# Altium PCB УШЯИ 758725.634.PcbDoc (part 2 of 2)
Units mm, origin at the board's own origin, x right, y up, seen from the top; angles counter-clockwise.
Board outline 220 x 115 mm, 2 copper layers (Top Layer, Top, Bottom Layer, Bottom), stack 1.571 mm thick; 229 components, 122 nets, 707 pads, 215 vias.
Unrouted connection lines stored in the file: 1.
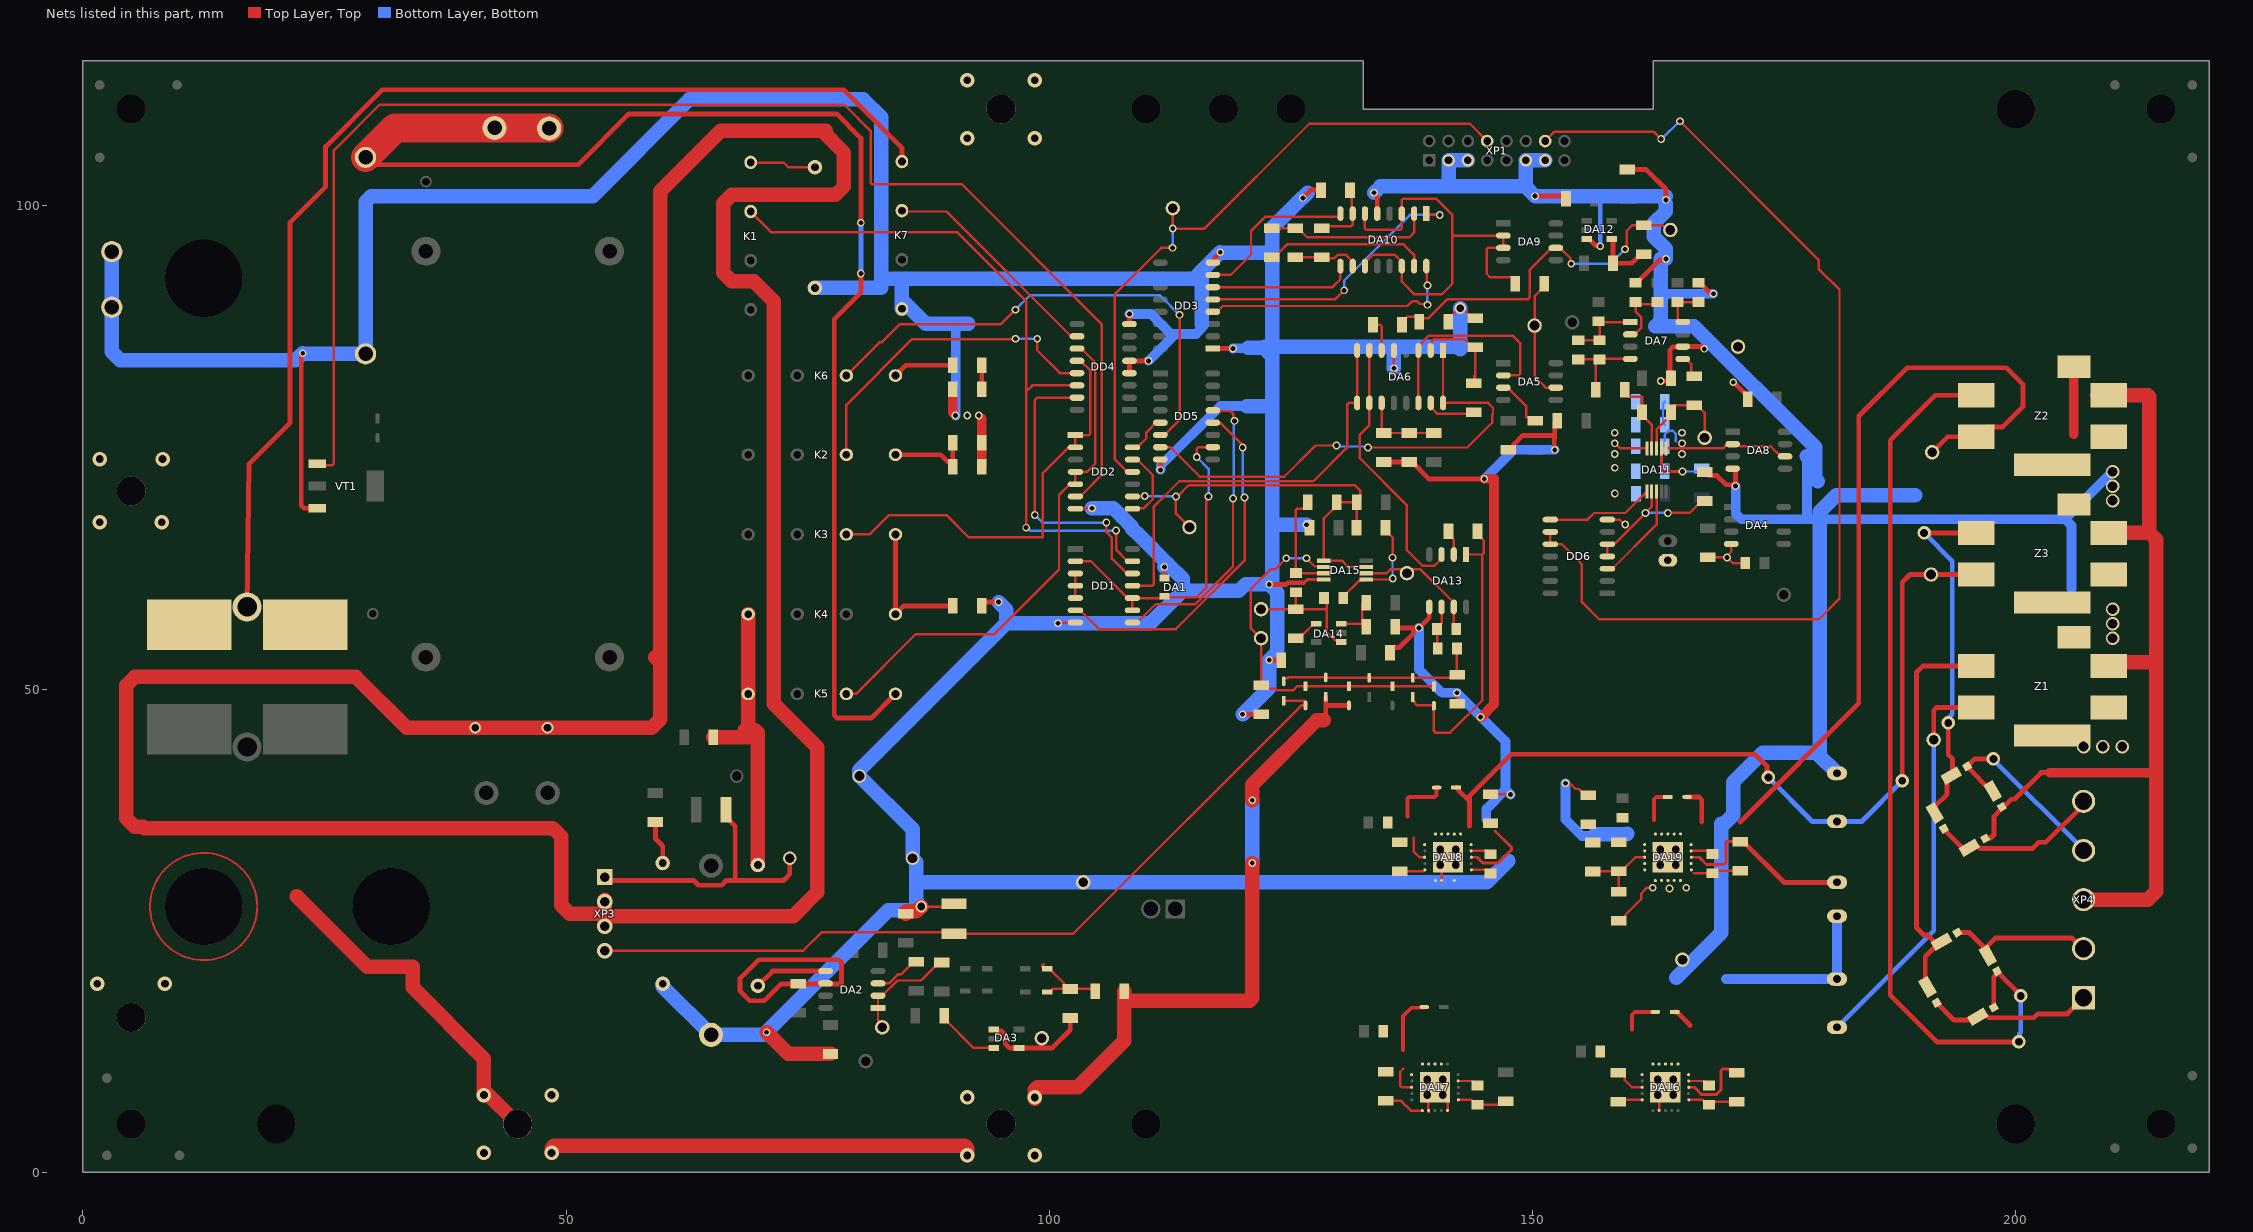
[diagram p2: the nets of this part, all layers, seen from the top]

## Via types
v1: diameter 0.8, hole 0.5, Top Layer, Top to Bottom Layer, Bottom, 151 vias
v2: diameter 1.2, hole 0.8, Top Layer, Top to Bottom Layer, Bottom, 20 vias
v3: diameter 1.5, hole 0.8, Top Layer, Top to Bottom Layer, Bottom, 18 vias
v4: diameter 1.8, hole 1, Top Layer, Top to Bottom Layer, Bottom, 10 vias
v5: diameter 1.4, hole 1, Top Layer, Top to Bottom Layer, Bottom, 9 vias
v6: diameter 1.4, hole 0.8, Top Layer, Top to Bottom Layer, Bottom, 7 vias

## Nets (pads, with @x,y where several pads share a name; then routed paths per layer and width w, separated by ;. In a path a pad name is that pad's centre, name@x,y a point inside that pad or via, vN(x,y) a via of type N, cw(c..) or ccw(c..) an arc to the next point about the centre after c; other vN are vias at no path point) (continued)
GNDV: C1.1 C4.2 C5.1 C7.2 C8.1 C9.1 C10.2 C11.1 C12.2 C14.2 C15.2 C16.2 C18.2 C19.1 C20.1 C21.2 C22.2 C23.2 C24.1 C25.2 C26.1 C27.2 C28.2 C29.1 C30.2 C31.1 C32.1 C33.1 C34.1 C35.1 C36.1 C37.1 C38.1 C39.1 C40.1 C41.1 C43.1 DA1.1 DA4.4 DA6.5 DA7.6 DA8.4 DA10.5 DA11.5 DA12.3 DA13.5 DA15.4 DA16.5 DA16.7 DA16.11 DA16.17 DA16.18 DA16.19 DA16.21 DA17.6 DA17.7 DA17.10 DA17.11 DA17.17 DA17.18 DA17.19 DA17.21 DA18.5 DA18.6 DA18.7 DA18.9 DA18.11 DA18.17 DA18.18 DA18.19 DA18.21 DA19.4 DA19.5 DA19.6 DA19.7 DA19.8 DA19.9 DA19.10 DA19.11 DA19.12 DA19.17 DA19.18 DA19.19 DA19.21 DD1.7 DD2.7 DD3.1 DD3.8 DD4.4 DD4.5 DD4.8 DD5.8 DD6.7 FV1.1 FV2.1 K7.7 KT8.1 KT18.1 KT19.1 pad.2@3,89.5 pad.2@3,95.25 R1.1 R2.1 R3.1 R4.1 R5.1 R6.1 R7.1 R19.1 R21.1 R26.2 R27.1 R31.1 R37.1 R42.1 R45.1 R47.2 R48.1 R57.1 VT1.3 XP1.3 XP1.5 XP1.11 XP1.13 Z1.4 Z2.4 Z3.4 | length 1017.7
  Top Layer, Top w0.25: C12.2@147.5,74.75 148.087,75.337
  Top Layer, Top w0.254: v2(86.75,27.5) 89.821,27.5 R19.1@90.121,27.8 ; v1(100.9,56.8) 100.939,56.839 102.661,56.839 DD1.7@102.7,56.877 ; DD2.7@102.7,68.659 102.728,68.687 104.382,68.687 v1(104.41,68.715) ; DA1.1@111.9,61.5 v1(111.9,62.638) ; DD3.1@116.912,85.229 DD3.1@116.948,85.264 ; DD3.8@116.912,94.119 116.966,94.119 DD3.8@117.149,94.301 ; R47.2@121.895,47.4 R47.2@121.904,47.409 ; C38.1@134.8,7.399 136.387,7.399 137.404,6.382 DA17.6@138.6,6.382 ; v1(135.649,83.198) DA6.5@135.649,85.029 ; C39.1@136.243,31.135 138.661,31.135 138.826,31.3 DA18.5@138.843,31.3 ; R21.1@137,73.492 R21.1@137.232,73.492 R21.1@137.532,73.492 ; DA17.7@139.179,6.382 139.197,6.4 139.197,8.097 DA17.21@139.9,8.8 v2(140.7,8) 141.2,7.5 DA17.10@141.2,6.4 ; 139.197,6.247 139.238,6.288 139.238,6.388 DA17.7@139.25,6.4 ; 140.593,30.043 DA18.7@140.593,30.2 140.593,31.95 DA18.21@141.243,32.6 ; C19.1@141.284,87.996 141.284,88.296 142.387,89.4 v2(142.5,89.4) 142.604,89.296 142.861,89.296 143.784,88.372 R31.1@144.084,88.372 ; v1(142.172,49.615) 142.172,48.528 R48.1@142.204,48.496 ; DA17.11@142.318,7.5 143.65,7.5 144.175,6.975 C35.1@144.3,6.975 146.508,6.975 146.9,7.367 C31.1@147.2,7.367 ; DA18.11@143.661,31.3 145.133,31.3 145.518,30.915 C36.1@145.643,30.915 ; C32.1@145.643,39.1 v1(147.7,39.1) ; v1(153.4,40.25) 153.504,40.146 153.954,40.146 154.442,39.658 154.792,39.658 155.45,39 C43.1@155.75,39 ; DD6.7@157.735,67.532 158.972,67.532 159.467,67.036 v1(159.581,67.036) ; v1(158.491,75.422) 158.555,75.422 159.075,74.902 DA11.5@161.82,74.902 ; C34.1@158.86,7.3 159.06,7.5 DA16.5@161.326,7.5 ; R57.1@158.9,26.025 159.2,26.025 159.573,26.398 159.573,26.599 161.227,28.253 161.227,28.827 161.851,29.451 v1(162.425,29.451) ; R26.2@160.654,92.042 R26.2@160.779,92.042 ; DA16.7@163.093,6.4 163.093,8.15 DA16.21@163.743,8.8 ; v1@163.696,94.396 v1(163.8,94.5) ; DA16.11@166.161,7.5 167.593,7.5 168.118,6.975 C33.1@168.243,6.975 168.568,7.3 C29.1@171.143,7.3 ; 166.668,30.933 C41.1@168.6,30.933 168.879,31.211 C40.1@171.5,31.211 ; R27.1@167.182,92.042 R27.1@167.307,92.042 ; R42.1@167.791,72.452 R42.1@168.164,72.079 ; C8.1@168.135,63.622 v1(170.116,63.622) ; v1@168.345,91.004 168.596,91.004 v1(168.7,90.9) ; DA4.4@170.554,65.017 170.554,64.207 170.116,63.77 v1(170.116,63.622) ; DA8.4@170.696,72.802 170.817,72.802 DA8.4@171,72.619 ; v1@170.867,71.133 v1(171,71) ; C9.1@171.991,63.022 170.716,63.022 v1(170.116,63.622)
  Top Layer, Top w0.342: 126.332,61 126.666,61.334 DA15.4@128.412,61.334
  Top Layer, Top w0.492: 124.662,61 126.332,61
  Top Layer, Top w0.5: v1(22.75,84.75) 22.75,84.561 22.6,84.411 22.6,68.993 22.893,68.7 VT1.3@24.25,68.7 ; R5.1@93,58.6 93,58.75 93.25,59 v1(94.75,59) ; DD4.4@108.287,82.688 DD4.5@108.287,83.958 v1(110.25,83.958) ; DD4.8@108.287,87.768 v1(108.287,88.809) ; v1(111.488,72.681) DD5.8@111.488,73.755 ; DD3.1@116.948,85.264 116.983,85.229 v1(119,85.229) ; DD3.8@117.149,94.301 117.149,94.661 v1(117.674,95.186) ; v1(120,47.4) R47.2@121.895,47.4 ; v1(122.75,53) C25.2@124,53 ; v1(122.75,60.831) 124.493,60.831 124.662,61 ; v1(126.228,100.822) 127.028,101.622 R37.1@128.114,101.622 ; v1(133.599,101.343) 133.599,101.261 133.924,100.936 DA10.5@133.924,99.192 ; C10.2@134.607,73.5 R21.1@137,73.5 ; C26.1@135.25,53.75 135.25,54.05 135.5,54.3 136.221,54.3 137.651,55.73 137.651,56.2 137.785,56.334 ; R45.1@135.8,56.459 135.8,56.334 137.785,56.334 ; R21.1@137.532,73.492 139.274,71.75 v1(145,71.75) ; DA13.5@139.307,58.497 139.307,57.39 v1(138.25,56.334) 137.785,56.334 ; 148.087,75.337 149,76.25 152.298,76.25 ; v1(150.25,101) 153.197,101 C24.1@153.447,100.75 ; v1(152.298,74.75) 152.241,74.807 152.241,75.861 152.298,75.918 152.298,76.25 ; C11.1@152.548,77.75 152.298,77.5 152.298,76.25 ; DA12.3@155.6,96.55 155.85,96.55 156.525,95.875 156.943,95.875 v1(157,95.818) ; C23.2@159.8,103.75 161.75,103.75 163.8,101.7 v1(163.8,100.612) ; R26.2@160.779,92.042 163.132,94.396 v1@163.696,94.396 ; v1(163.25,81.862) 164.02,81.862 164.221,82.064 164.221,85.105 164.514,85.398 165.503,85.398 DA7.6@165.532,85.427 167.52,85.427 v1(167.75,85.197) ; R27.1@167.307,92.042 v1@168.345,91.004 ; R42.1@168.164,72.079 169.073,72.079 170.019,71.133 v1@170.867,71.133 ; v1(170.75,81.75) 170.8,81.75 172.25,80.3 C14.2@172.25,80 ; v1(171,71) DA8.4@171,72.619
  Top Layer, Top w1: 90,78.6 R7.1@90,81 ; C1.1@93,73 R4.1@93,75.5 93,78 ; v1@144.645,47.074 146,48.429 146,71.75 v1(145,71.75) ; 206,76.382 Z2.4@206,83.35
  Top Layer, Top w1.5: v1(70.75,14.5) 73,12.25 C4.2@77.358,12.25 ; C5.1@85.12,26.75 85.12,26.95 85.17,27 86.25,27 v2(86.75,27.5)
  Bottom Layer, Bottom w0.254: v1@167.75,85 v1(167.75,85.197)
  Bottom Layer, Bottom w0.421: 163.277,100.226 163.277,101 163.277,101.111
  Bottom Layer, Bottom w0.5: v1(157,95.818) 157,101 157,101.062
  Bottom Layer, Bottom w1: 90.242,87.8 90.3,87.742 v1(90.3,78.3) ; v1(108.287,88.809) 110.527,88.809 112.577,86.759 112.577,86.736 113.028,86.736 ; v1(110.25,83.958) 113.028,86.736 ; v1(111.488,72.681) 111.526,72.719 111.526,73.123 117.687,79.285 120.416,79.285 ; 115.768,87.768 115.768,87.322 115.183,86.736 113.028,86.736 ; v1(119,85.229) 119.038,85.267 120.523,85.267 120.556,85.3 ; v1(138.25,56.334) 138.25,52 140.635,49.615 v1(142.172,49.615) 147.2,44.587 147.2,39.6 ; v1(145,71.75) 148,74.75 v1(152.298,74.75) ; 145.206,36.536 145.206,37.606 147.2,39.6 ; v1@147.75,39.05 v1(147.7,39.1) 147.2,39.6 ; v1(153.4,40.25) 153.4,36.5 155.104,34.796 156.1,34.796 ; 163.8,90.75 163.95,90.9 v1(168.7,90.9) ; v1@163.8,100.226 v1(163.8,100.612) v1@163.8,100.997 ; 170,20 C28.2@181.493,20 ; v1(171,71) 171,68.171 171.586,67.585 178.25,67.585 ; 178.384,74.091 178.384,67.719 178.25,67.585 ; C28.2@181.5,20.007 C37.1@181.5,26.5 ; 205.75,60.375 205.75,66.92 205.085,67.585 ; v5(210,72.5) 205.085,67.585 ; 178.25,67.585 179.725,67.585 205.085,67.585
  Bottom Layer, Bottom w1.5: pad.2@3,95.25 pad.2@3,89.5 3,84.879 3.879,84 22,84 v1(22.75,84.75) 22.82,84.68 R6.1@29.25,84.68 29.25,100.414 29.836,101 52.75,101 62.75,111 80.75,111 82.59,109.16 82.59,92.429 ; R2.1@60,19.5 60,19.22 R1.1@65,14.22 70.47,14.22 83.348,27.098 86.348,27.098 v2(86.75,27.5) 86.25,28 86.25,30 ; R3.1@75.75,91.5 82.59,91.5 82.59,92.429 ; K7.7@84.75,89.34 84.75,91.965 85.215,92.429 ; K7.7@85.215,89.805 87.219,87.8 90.242,87.8 91.625,87.8 ; v1(94.75,59) 95.55,58.2 95.55,56.8 ; v1(100.9,56.8) 95.55,56.8 ; v1@101.027,56.8 110.449,56.8 113.799,60.15 ; v1(104.41,68.715) 106.636,68.715 107.501,67.85 108.544,66.807 108.544,66.649 109.393,65.8 112.228,62.966 ; v1(111.9,62.638) 112.228,62.966 ; 115.768,87.768 115.768,93.28 ; v1(120,47.4) 122.75,50.15 v1(122.75,53) 123.604,53.854 123.604,59.977 v1(122.75,60.831) ; 120.416,79.285 122.648,79.285 123.056,78.877 ; 120.556,85.3 122.177,85.3 ; v1(126.612,67) 123.056,67 ; 126.748,101.343 v1(126.228,100.822) 126.167,100.822 123.056,97.711 123.056,95.117 ; v1(133.599,101.343) 134.257,102 149.25,102 149.3,101.95 ; v1(135.649,83.198) 135.649,85.417 ; 141.3,102.25 XP1.3@141.3,104.7 XP1.5@143.3,104.7 ; 142.235,85.417 135.649,85.417 ; 142.5,85.152 v2(142.5,89.4) ; 147.5,32.25 145.25,30 KT18.1@103.5,30 86.25,30 ; XP1.13@151.3,104.7 XP1.11@149.3,104.7 149.3,101.95 ; 156.496,35 159.718,35 159.773,35.056 ; 163.277,94.5 163.277,88.119 162.711,87.553 166.697,87.553 179.25,75 179.25,73.225 ; v1(163.8,94.5) 163.8,95.546 162.55,96.796 162.55,98.204 163.8,99.454 v1@163.8,100.226 ; v1@163.8,100.997 163.797,101 163.277,101 157,101 v1(150.25,101) 149.3,101.95 ; 164.875,20.125 169.528,24.778 169.528,36.075 169.825,36.075 170.75,37 170.75,40.383 173.802,43.435 179.108,43.435 ; 178.384,74.091 179.25,73.225 ; 179.484,71.516 179.25,71.75 179.25,73.225 ; C30.2@181.493,41.3 181.243,41.3 181.193,41.35 181.193,41.6 179.725,43.068 179.725,67.585 179.725,68.335 181.432,70.042 189.578,70.042 ; 82.59,92.429 85.215,92.429 ; 85.215,92.429 114.918,92.429 115.768,93.28 ; 86.25,30 86.25,32.1 FV1.1@85.85,32.5 85.85,35.5 FV2.1@80.35,41 80.35,41.6 95.55,56.8 ; 112.228,62.966 113.799,61.394 113.799,60.15 ; 113.799,60.15 119.615,60.15 120.296,60.831 v1(122.75,60.831) ; 115.768,93.28 v1(117.674,95.186) 117.744,95.117 123.056,95.117 ; 122.177,85.3 123.056,84.421 ; 122.177,85.3 122.294,85.417 123.056,85.417 ; v1(122.75,60.831) 123.056,61.137 123.056,67 ; 123.056,67 123.056,78.877 ; 123.056,78.877 123.056,84.421 ; 123.056,84.421 123.056,85.417 ; 123.056,85.417 123.056,95.117 ; 123.056,85.417 135.649,85.417
  other v1: 164.162,29.377 165.9,29.451 144.617,47.101 158.51,70.238 158.51,72.901 158.491,74.322 158.491,76.522 91.5,78.3 92.7,78.3
  other v2: 139.1,8 162.943,8 164.543,8 139.1,9.6 140.7,9.6 162.943,9.6 164.543,9.6 140.443,31.8 142.043,31.8 163.2,31.8 164.8,31.8 140.443,33.4 142.043,33.4 163.2,33.4 164.8,33.4
  other v5: 207.003,44.05 209,44.05 211,44.05 210,55.25 210,56.75 210,58.25 210,69.5 210,71
GRD: pad.0@5,16 pad.0@5,70.5 pad.0@45,5 pad.0@95,5 pad.0@95,110 R18.2 VD8.2 VD13.1 XP3.2 XP3.3 | length 510.3
  Top Layer, Top w0.2: 18.051,27.5 ccw(c12.5,27.5) 18.051,27.5
  Top Layer, Top w0.5: 128.404,46.75 128.6,46.946 128.6,48.302 ; VD13.1@128.6,49.203 128.6,48.302 ; VD8.2@131,48.302 128.6,48.302
  Top Layer, Top w1.5: 22.125,28.564 29.439,21.25 34.121,21.25 34.121,19.129 41.5,11.75 v3(41.5,8) ; v3@41.75,8.25 pad.0@45,5 ; v3(48.5,2) 48.5,2.5 48.75,2.75 91.25,2.75 91.5,2.5 v3(91.5,1.75) ; XP3.3@54,25.46 54,26.5 ; XP3.2@54,28.2 XP3.2@54,28 54,26.5 ; 59.24,53.3 59.75,52.79 ; 76.862,107.75 76.5,107.75 ; v3@98.5,7.621 v3(98.5,7.75) 98.5,8.55 98.75,8.8 102.954,8.8 107.75,13.596 107.75,17.75 ; R18.2@107.75,18.75 107.75,17.75 ; v1(121,32) 121,18.038 120.712,17.75 107.75,17.75 ; v1(121,38.5) 121,40.109 127.641,46.75 128.404,46.75 ; 54,26.5 73.5,26.5 76,29 76,43.959 71.5,48.459 71.5,90.121 69.421,92.2 67.129,92.2 66.25,93.079 66.25,100.243 67.129,101.121 77.871,101.121 78.75,102 78.75,105.5 76.5,107.75 ; 54,26.5 53.75,26.75 50.379,26.75 49.5,27.629 49.5,34.743 48.621,35.621 6.379,35.621 6.25,35.75 5.379,35.75 4.5,36.629 4.5,50.371 5.379,51.25 28.25,51.25 33.5,46 v2(40.611,46) v2(48.074,46) 58.871,46 59.75,46.879 59.75,52.79 ; 59.75,52.79 59.75,101.5 66,107.75 76.5,107.75
  Bottom Layer, Bottom w1.5: v1(121,32) v1(121,38.5)
  other v3: 98.5,1.75 41.5,2 91.5,7.75 48.5,8 1.5,19.5 8.5,19.5 1.75,67.25 8.173,67.25 1.75,73.8 8.25,73.8 91.5,107 98.5,107 91.5,113 98.5,113
I0: DD1.12 DD4.15 | length 30.8
  Top Layer, Top w0.254: v1(98.5,68) 98.5,79.9 98.749,80.148 DD4.15@102.863,80.148 ; v1(105.897,67.227) 105.897,66.234 106.473,65.657 106.473,63.501 108.017,61.957 DD1.12@108.6,61.957
  Bottom Layer, Bottom w0.254: v1(98.5,68) 99.273,67.227 v1(105.897,67.227)
K1: DD1.13 DD4.14 K1.3 | length 74.9
  Top Layer, Top w0.254: K1.3@69.1,99.41 71.26,97.25 90.5,97.25 97.6,90.15 97.6,80.77 ; v1(97.6,66.7) 97.6,80.77 ; DD4.14@102.863,81.419 98.249,81.419 97.6,80.77 ; v1(106.9,66.4) 106.9,64.427 108.1,63.227 DD1.13@108.6,63.227
  Bottom Layer, Bottom w0.254: v1(97.6,66.7) 97.722,66.7 98.022,66.4 v1(106.9,66.4)
K2: DD4.13 K2.3 | length 34
  Top Layer, Top w0.254: K2.3@79,74.25 79,79.399 85.801,86.2 96.45,86.2 v1(96.5,86.25) ; v1(98.75,86.25) 98.75,85.033 101.095,82.688 DD4.13@102.863,82.688
  Bottom Layer, Bottom w0.254: v1(96.5,86.25) v1(98.75,86.25)
K3: DD2.1 DD2.2 DD4.12 K3.3 | length 44.4
  Top Layer, Top w0.254: K3.3@79,66 81.395,66 83.395,68 89.356,68 91.661,65.695 98.98,65.695 99.3,65.695 99.3,67.63 99.327,67.657 99.327,68.343 99.3,68.37 99.3,72.3 101.942,74.942 102.634,74.942 DD2.2@102.7,75.009 DD2.1@102.7,76.279 104.101,76.279 104.25,76.427 104.25,82.941 103.233,83.958 DD4.12@102.863,83.958
K4: DD2.4 DD2.5 DD4.11 K5.3 | length 53.8
  Top Layer, Top w0.254: K5.3@79,49.5 80,49.5 86.179,55.679 94.322,55.679 101,62.357 101,70.07 102.128,71.199 DD2.5@102.7,71.199 DD2.4@102.7,72.469 103.881,72.469 104.75,73.338 104.75,83.779 103.3,85.229 DD4.11@102.863,85.229
K5: DD4.10 K7.3 | length 23.5
  Top Layer, Top w0.254: K7.3@84.75,99.5 84.84,99.41 89.34,99.41 102.093,86.657 102.159,86.657 102.318,86.498 DD4.10@102.863,86.498
KC: DD5.6 K6.3 | length 52
  Top Layer, Top w0.254: K6.3@79,82.438 82.42,85.858 82.652,85.858 84.544,87.75 95,87.75 v1(96.5,89.25) ; DD5.6@111.707,76.295 111.925,76.295 113.477,77.846 v1(113.477,88.714)
  Bottom Layer, Bottom w0.254: v1(96.5,89.25) 98,90.75 106.947,90.75 109.626,90.75 111.441,90.75 v1(113.477,88.714)
NetC1_2: C1.2 K2.1 R4.2 | length 9.1
  Top Layer, Top w0.5: K2.1@84.08,74.25 88.75,74.25 89.45,73.55 89.75,73.55 90,73.3 C1.2@90,73 R4.2@90,75.5
NetC2_1: C2.1 R7.2 | length 2.5
  Top Layer, Top w0.5: R7.2@93,81 C2.1@93,83.5
NetC2_2: C2.2 K6.1 | length 6.4
  Top Layer, Top w0.5: K6.1@84.08,82.438 85.142,83.5 C2.2@90,83.5
NetC3_1: C3.1 R2.2 | length 4.6
  Top Layer, Top w0.5: C3.1@59.25,36.25 59.25,34.51 60,33.76 R2.2@60,32
NetC10_1: C10.1 DA6.11 R20.1 R21.2 | length 8.4
  Top Layer, Top w0.254: DA6.11@134.379,79.605 134.379,76.728 C10.1@134.607,76.5 134.615,76.492 R20.1@139.765,76.492
NetC13_1: C13.1 DA7.1 R25.2 R28.1 | length 9.6
  Top Layer, Top w0.254: C13.1@154.72,86.102 R28.1@156.947,86.102 ; R25.2@156.82,88.042 157.053,88.042 156.946,87.936 R28.1@156.946,86.475 ; R28.1@156.92,86.102 R28.1@156.946,86.128 ; R25.2@157.053,87.967 DA7.1@160.108,87.967 ; R28.1@156.947,86.102 R28.1@157.32,86.475 ; R28.1@156.947,86.102 R28.1@157.32,86.475 ; R28.1@156.946,86.128 R28.1@156.946,86.475 ; R28.1@156.946,86.128 R28.1@156.946,86.475 ; R28.1@156.946,86.128 R28.1@156.946,86.475 ; R28.1@156.946,86.475 R28.1@157.32,86.475
NetC13_2: C13.2 DA7.4 R28.2 R33.1 | length 8.1
  Top Layer, Top w0.254: C13.2@154.72,84.102 156.52,84.102 R33.1@156.52,80.962 ; R28.2@156.975,84.157 DA7.4@160.108,84.157
NetC16_1: C16.1 C18.1 C21.1 DA8.2 DA8.6 DA11.1 | length 18.6
  Top Layer, Top w0.254: DA11.1@163.82,74.902 169.711,74.902 DA8.2@170.151,75.342 ; DA8.2@170.258,75.342 DA8.2@170.477,75.342 ; DA8.2@170.696,75.342 171.24,75.342 171.47,75.112 174.642,75.112 175.682,74.072 DA8.6@176.12,74.072
  Bottom Layer, Bottom w0.254: C16.1@163.67,75.127 163.67,76.327 164.067,76.724 164.494,76.724 164.795,76.424 164.795,75.65 ; C21.1@163.67,77.349 163.491,77.528 163.491,79.543 C18.1@163.67,79.722
  other v1: 165.462,74.322 165.462,75.422 165.462,76.522
NetC19_2: C19.2 DA9.6 KT7.1 R38.1 R39.2 | length 37.2
  Top Layer, Top w0.254: R39.2@136.49,87.696 136.49,87.996 136.99,88.496 137.911,88.496 138.284,88.123 C19.2@138.284,87.996 138.284,87.999 138.657,88.372 139.232,88.372 141.209,90.349 149.538,90.349 149.726,90.538 149.726,93.41 151.961,95.645 DA9.6@152.399,95.645 152.836,95.645 153.896,94.585 153.896,94.104 v1(154,94) ; v1(159.55,95.5) 159.55,95.648 159.75,95.848 159.75,97.423 160.327,98 R38.1@161.5,98 163.413,98 163.913,97.5 KT7.1@164.25,97.5
  Bottom Layer, Bottom w0.254: v1(154,94) 158.05,94 v1(159.55,95.5)
NetC20_2: C20.2 DA11.2 R40.1 | length 8.3
  Top Layer, Top w0.3: DA11.2@163.32,74.902 163.32,72.827 163.636,72.511 v1(165.51,72.511)
  Bottom Layer, Bottom w0.254: C20.2@163.67,72.511 v1(165.51,72.511) 167.18,72.511 R40.1@167.491,72.822
NetC28_1: C28.1 C29.2 DA16.13 DA16.15 DA16.16 KT15.1 VD22.1 Z1.3 | length 51.4
  Top Layer, Top w0.3: DA16.13@166.161,8.8 166.164,8.797 166.742,8.797 167.096,8.443 167.096,8.425 167.45,8.071 169.035,8.071 169.5,8.536 169.5,10.524 169.676,10.7 170.317,10.7 170.367,10.65 170.793,10.65 C29.2@171.143,10.3
  Top Layer, Top w0.5: VD22.1@164.7,16.6 164.899,16.6 166.3,15.199 ; KT15.1@191.5,44.75 191.5,47.807 191.793,48.1 Z1.3@195.9,48.1
  Bottom Layer, Bottom w0.5: C28.1@181.493,15 181.599,15 182.015,15.416 182.015,15.522 191.5,25.007 KT15.1@191.5,44.75
NetC30_1: C30.1 C32.2 DA18.13 DA18.15 DA18.16 KT17.1 VD24.1 Z3.3 | length 91.4
  Top Layer, Top w0.3: DA18.13@143.661,32.6 143.664,32.597 144.264,32.597 144.85,32.011 146.435,32.011 147.8,33.376 147.8,33.625 146.099,35.326
  Top Layer, Top w0.5: VD24.1@142.068,39.8 142.267,39.8 142.321,39.746 142.321,39.547 143.485,38.383 ; 143.485,35.809 143.485,38.383 ; v6(174.395,40.855) 174.247,41.003 174.247,42.003 173,43.25 147.78,43.25 143.485,38.955 143.485,38.383 ; v6(188.25,40.5) 188.25,61.057 189.043,61.85 Z3.3@194.15,61.85
  Bottom Layer, Bottom w0.5: v6(174.395,40.855) 178.95,36.3 184.05,36.3 v6(188.25,40.5)
NetC33_2: C33.2 DA16.14 | length 2.3
  Top Layer, Top w0.254: DA16.14@166.143,9.45 167.669,9.45 168.118,9.002 C33.2@168.243,9.002
NetC34_2: C34.2 DA16.1 DA16.3 DA16.20 NT1.1 VD22.2 | length 7.4
  Top Layer, Top w0.25: 160.462,8.8 DA16.3@161.325,8.8
  Top Layer, Top w0.254: C34.2@158.86,10.3 159.16,10.3 159.533,9.927 159.533,9.544 160.277,8.8 160.462,8.8
  Top Layer, Top w0.4: 160.3,14.749 160.3,16.3 160.6,16.6 VD22.2@162.7,16.6
NetC35_2: C35.2 DA17.14 | length 2.2
  Top Layer, Top w0.254: DA17.14@142.3,9.45 143.7,9.45 144.175,8.975 C35.2@144.3,8.975
NetC36_2: C36.2 DA18.14 | length 2.1
  Top Layer, Top w0.254: DA18.14@143.643,33.25 145.308,33.25 C36.2@145.643,32.915
NetC37_2: C37.2 C40.2 DA19.13 DA19.15 DA19.16 KT16.1 VD25.2 Z2.3 | length 103.8
  Top Layer, Top w0.3: DA19.13@166.418,32.6 167.236,32.6 168,31.837 169.787,31.837 170,32.049 170,34.175 170.036,34.211 C40.2@171.8,34.211
  Top Layer, Top w0.5: VD25.2@165.983,38.836 167.207,38.836 167.5,38.543 167.5,36.248 ; 171.463,36.248 183.75,48.535 183.75,78.25 188.75,83.25 199,83.25 200.75,81.5 200.75,79.25 198.6,77.1 196.9,77.1 Z2.3@195.9,76.1 192.936,76.1 KT16.1@191.336,74.5 ; C40.2@171.8,34.211 176.011,30 C37.2@181.5,30
NetC38_2: C38.2 DA17.1 DA17.3 DA17.20 NT2.1 VD23.2 | length 9.2
  Top Layer, Top w0.254: 136.613,10.713 136.3,10.4 136.3,8.949 136.449,8.8 DA17.3@137.482,8.8 ; VD23.2@138.73,17.031 VD23.2@138.8,17.1
  Top Layer, Top w0.4: 136.6,12.646 136.6,16.161 137.47,17.031 VD23.2@138.73,17.031
NetC39_2: C39.2 DA18.1 DA18.3 DA18.20 NT3.1 VD24.2 | length 8.6
  Top Layer, Top w0.254: 137.68,34.64 137.68,33.199 138.279,32.6 DA18.3@138.825,32.6
  Top Layer, Top w0.4: 137.043,36.825 137.043,38.668 137.192,38.817 139.833,38.817 140.067,39.051 VD24.2@140.067,39.8
NetC41_2: C41.2 DA19.14 | length 2.3
  Top Layer, Top w0.254: DA19.14@166.4,33.25 168.283,33.25 C41.2@168.6,32.933
NetC42_1: C42.1 DA19.3 R56.1 R57.2 | length 8.1
  Top Layer, Top w0.254: C42.1@156.2,31.125 156.21,31.135 158.875,31.135 R56.1@158.9,31.16 ; R57.2@158.9,29.025 R56.1@158.9,31.16 ; DA19.3@161.582,32.6 160.64,32.6 159.2,31.16 R56.1@158.9,31.16
NetC42_2: C42.2 C43.2 DA19.1 DA19.2 DA19.20 NT4.1 R56.2 VD25.1 | length 3.7
  Top Layer, Top w0.4: 162.576,36.422 162.576,38.602 162.811,38.836 VD25.1@163.983,38.836
NetDA1_2: DA1.2 DD1.2 DD1.9 DD1.10 DD5.10 | length 33.6
  Top Layer, Top w0.254: DD1.2@102.7,63.227 104.29,63.227 108.1,59.417 DD1.10@108.6,59.417 ; DD1.9@108.6,58.147 DD1.10@108.6,59.417 ; v1(115.25,74) 115.25,74.864 115.399,75.012 116.899,75.012 DD5.10@116.912,75.025 ; v1(116.475,69.929) 116.475,69.781 116.25,69.556 116.25,60.505 115.264,59.519 111.981,59.519 DA1.2@111.9,59.6 111.682,59.382 109.235,59.382 109.2,59.417 DD1.10@108.6,59.417
  Bottom Layer, Bottom w0.254: v1(115.25,74) 116.475,72.775 v1(116.475,69.929)
NetDA2_1: DA2.1 DA2.2 KT2.1 R16.1 | length 11.3
  Top Layer, Top w0.254: DA2.1@82.274,17.01 82.274,15.775 82.711,15.337 KT2.1@82.711,15 ; DA2.1@82.274,17.144 DA2.2@82.274,18.28 82.711,18.28 84.276,19.845 86.706,19.845 88.568,21.707 R16.1@88.868,21.707
NetDA2_3: DA2.3 R12.1 | length 4.9
  Top Layer, Top w0.254: DA2.3@82.274,19.55 83.41,19.55 84.339,20.479 84.648,20.479 85.95,21.78 R12.1@86.25,21.78
NetDA2_5: DA2.5 R14.1 | length 7.6
  Top Layer, Top w0.5: R14.1@69.85,19.3 71.37,20.82 DA2.5@76.85,20.82
NetDA2_6: DA2.6 R15.1 | length 26.8
  Top Layer, Top w0.5: DA2.6@76.363,19.599 76.801,19.599 DA2.6@76.85,19.55 ; 78.5,19.5 R15.1@74,19.5 72.26,19.5 70.51,17.75 69,17.75 68,18.75 68,20.07 69.93,22 78.207,22 78.5,21.707 78.5,19.75
NetDA3_1: DA3.1 DA3.4 KT3.1 R17.1 | length 12.2
  Top Layer, Top w0.5: DA3.1@94.265,14.777 94.515,14.777 94.661,14.631 95.023,14.631 95.44,14.214 95.44,13.294 95.858,12.877 DA3.4@96.865,12.877 100.318,12.877 102.165,14.724 R17.1@102.165,15.974 ; 99.222,12.877 KT3.1@99.222,13.877
NetDA3_3: DA3.3 R13.1 | length 6.7
  Top Layer, Top w0.254: R13.1@89.127,16.217 89.127,15.917 92.167,12.877 DA3.3@94.265,12.877
NetDA5_2: DA5.2 DA6.3 DA6.14 | length 21.9
  Top Layer, Top w0.254: DA6.14@138.189,79.824 DA6.3@138.189,85.029 138.189,85.466 139.299,86.576 147.924,86.576 148.703,85.797 148.703,82.601 148.555,82.452 DA5.2@146.975,82.452
NetDA5_3: DA5.3 R22.2 | length 5.4
  Top Layer, Top w0.254: DA5.3@146.975,81.182 147.412,81.182 149.327,79.267 149.327,78.123 149.877,78.123 R22.2@150.25,77.75
NetDA5_6: DA5.6 KT6.1 R29.1 | length 12.7
  Top Layer, Top w0.254: R29.1@151.187,91.922 151.187,91.622 150.2,90.635 150.2,82.37 151.191,81.38 151.191,81.331 151.339,81.182 DA5.6@152.399,81.182
NetDA6_2: DA6.2 R30.1 R31.2 | length 10.6
  Top Layer, Top w0.254: DA6.2@139.459,85.029 139.513,85.084 139.513,85.902 139.784,86.172 142.984,86.172 143.784,85.372 R31.2@144.084,85.372 144.083,82.437 144.083,82.317 ; R30.1@143.903,81.642 143.963,81.702 143.963,81.762 143.963,82.317 143.963,82.437 144.084,82.317 ; R30.1@144.083,81.642 R30.1@144.083,81.702 ; R30.1@144.083,81.762 144.083,82.317
NetDA6_15: DA6.15 R30.2 | length 5.2
  Top Layer, Top w0.254: DA6.15@139.459,79.605 139.459,79.167 140.165,78.461 143.723,78.461 R30.2@143.903,78.642
NetDA7_2: DA7.2 R23.2 R26.1 | length 6.2
  Top Layer, Top w0.254: DA7.2@160.108,86.697 160.545,86.697 161.251,87.403 161.251,88.45 160.654,89.047 R26.1@160.654,90.042 160.894,89.802 R23.2@162.39,89.802
NetDA7_5: DA7.5 R32.1 | length 2.5
  Top Layer, Top w0.254: DA7.5@165.532,84.157 165.872,84.157 166.42,83.609 166.42,82.662 R32.1@166.72,82.362
NetDA7_8: DA7.8 R24.2 R27.2 | length 4.5
  Top Layer, Top w0.254: R24.2@165.003,90.042 165.003,88.165 165.201,87.967 DA7.8@165.532,87.967 ; R24.2@165.217,90.042 R27.2@167.182,90.042
NetDA9_2: DA9.2 DA9.3 DA10.3 DA10.6 DA10.11 DA10.14 R29.2 | length 48.5
  Top Layer, Top w0.254: DA10.11@132.654,93.768 132.654,94.136 133.43,94.911 135.758,94.911 136.464,94.205 DA10.14@136.464,93.768 136.464,92.149 137.783,90.83 140.601,90.83 141.7,91.929 141.7,96.915 ; DA10.6@132.654,99.192 132.654,97.649 132.803,97.5 136.316,97.5 136.464,97.649 DA10.3@136.464,99.192 136.464,100.601 136.613,100.75 140,100.75 141.7,99.05 141.7,96.915 ; R29.2@148,92.408 147.814,92.595 145.622,92.595 145.25,92.967 145.25,95.496 145.399,95.645 DA9.3@146.975,95.645 DA9.2@146.975,96.915 141.7,96.915
NetDA10_2: DA10.2 R34.1 R35.2 | length 17.3
  Top Layer, Top w0.254: R34.1@122.991,97.686 R35.2@125.428,97.686 R35.2@125.759,97.686 ; R35.2@125.759,97.655 126.664,96.75 137.245,96.75 137.734,97.24 DA10.2@137.734,99.192
NetDA10_7: DA10.7 R36.1 R37.2 | length 7
  Top Layer, Top w0.254: R36.1@128.307,97.532 128.638,97.862 131.236,97.862 131.384,98.011 DA10.7@131.384,99.192 131.309,99.268 131.309,99.971 131.303,99.976 131.303,101.343 131.191,101.455 131.114,101.532 R37.2@131.114,101.622
NetDA10_10: DA10.10 R35.1 R36.2 | length 6.9
  Top Layer, Top w0.254: R35.1@125.428,94.686 128.153,94.686 R36.2@128.159,94.68 128.283,94.557 129.467,94.557 129.822,94.911 130.678,94.911 131.384,94.205 DA10.10@131.384,93.768
NetDA10_15: DA10.15 R34.2 | length 16.9
  Top Layer, Top w0.254: R34.2@122.991,94.686 123.291,94.686 124.605,96 136.646,96 137.734,94.911 DA10.15@137.734,93.768
NetDA11_6: DA11.6 DD6.8 | length 11.2
  Top Layer, Top w0.254: DD6.8@151.835,67.532 155.697,67.532 156.378,68.213 159.581,68.213 DA11.6@161.82,70.452
NetDA11_7: DA11.7 DD6.4 DD6.5 R42.2 | length 15.7
  Top Layer, Top w0.254: DD6.4@157.735,63.722 DD6.5@157.735,64.992 157.801,65.058 158.506,65.058 v1(161.67,68.222) ; v1@161.686,68.222 162.32,68.856 DA11.7@162.32,70.452 ; v1(163.991,68.222) 166.261,68.222 167.491,69.452 R42.2@167.791,69.452
  Bottom Layer, Bottom w0.254: v1(161.67,68.222) v1(163.991,68.222)
NetDA11_8: DA11.8 DD6.3 | length 10.4
  Top Layer, Top w0.254: DD6.3@157.735,62.452 158.235,62.452 162.82,67.036 DA11.8@162.82,70.452
NetDA12_4: DA12.4 R38.2 R41.1 | length 6.1
  Top Layer, Top w0.5: DA12.4@158.27,96.55 158.32,96.5 R41.1@158.32,94.05 160.25,94.05 161.2,95 R38.2@161.5,95
NetDA13_1: DA13.1 R43.2 VD9.2 VD10.1 | length 31.4
  Top Layer, Top w0.254: VD10.1@137.588,49.17 137.588,48.826 137.844,48.57 137.844,48.482 138.023,48.302 139.756,48.302 VD9.2@139.788,48.27 139.788,45.649 139.937,45.5 141.472,45.5 144.793,48.821 144.793,63.921 ; DA13.1@143.117,63.921 144.793,63.921 ; R43.2@144.292,66.307 144.292,66.007 144.942,65.357 144.942,64.07 144.793,63.921
NetDA13_2: DA13.2 R43.1 | length 2.6
  Top Layer, Top w0.254: R43.1@141.292,66.307 141.292,66.007 141.847,65.452 DA13.2@141.847,63.921
NetDA13_6: DA13.6 R49.2 R50.1 | length 4.5
  Top Layer, Top w0.254: R49.2@140.172,54.204 140.112,54.264 140.112,56.334 140.577,56.799 DA13.6@140.577,58.497
NetDA13_7: DA13.7 DA15.6 KT13.1 R50.2 | length 13.4
  Top Layer, Top w0.254: DA15.6@132.812,61.984 134.895,61.984 135.292,62.381 138.4,62.381 141.847,58.934 DA13.7@141.847,58.497 R50.2@141.847,56.209
NetDA14_3: DA14.3 R44.1 R45.2 | length 5.3
  Top Layer, Top w0.254: DA14.3@130.212,56.759 131.162,56.759 R45.2@132.36,56.759 ; R45.2@132.8,56.459 132.5,56.759 R45.2@132.36,56.759 ; R44.1@132.8,58.934 132.726,59.009 132.578,59.009 132.36,58.791 R45.2@132.36,56.759
NetDA14_4: DA14.4 R46.1 | length 2.7
  Top Layer, Top w0.254: R46.1@125.5,55.259 125.873,55.632 126.235,55.632 127.362,56.759 DA14.4@127.612,56.759
NetDA15_2: DA15.2 KT12.1 R47.1 VD6.1 VD7.1 VD8.1 VD9.1 | length 37.9
  Top Layer, Top w0.254: v1(124.506,63.531) 123.387,62.412 122.918,62.412 120.827,60.321 120.827,56.336 KT12.1@121.904,55.259 R47.1@121.904,50.409 122.277,50.036 123.382,50.036 123.557,49.861 125.206,49.861 125.648,50.303 VD6.1@126.5,50.303 129.194,50.303 VD8.1@131,50.303 ; v1(126.612,63.531) 127.465,62.678 128.368,62.678 DA15.2@128.412,62.634 ; VD8.1@131.064,50.303 132.736,50.303 132.746,50.293 135.49,50.293 135.497,50.286 139.772,50.286 VD9.1@139.788,50.27
  Bottom Layer, Bottom w0.254: v1(124.506,63.531) v1(126.612,63.531)
NetDA15_3: DA15.3 R51.2 R53.1 | length 11.4
  Top Layer, Top w0.254: R53.1@126.75,69.309 126.75,69.009 126.377,68.636 125.62,68.636 125.471,68.487 125.471,62.029 R51.2@125.5,62 125.516,61.984 DA15.3@128.629,61.984
NetDA15_5: DA15.5 R52.1 R54.1 | length 11.7
  Top Layer, Top w0.25: R52.1@130.412,59.435 130.412,59.56 132.086,61.234 132.712,61.234 DA15.5@132.812,61.334 135.3,61.334 135.409,61.443 v1(135.523,61.443) ; R54.1@134.787,66.709 134.787,66.409 135.523,65.672 135.523,63.619 v1(135.5,63.595)
  Bottom Layer, Bottom w0.25: v1(135.5,63.595) 135.5,61.581 135.581,61.5 v1(135.523,61.443)
NetDD1_3: DD1.3 DD1.4 DD1.5 | length 2.5
  Top Layer, Top w0.254: DD1.5@102.7,59.417 DD1.3@102.7,61.957
NetDD1_6: DD1.6 DD5.12 | length 37.3
  Top Layer, Top w0.254: DD1.6@102.7,58.147 103.2,58.147 105.151,56.196 113.084,56.196 120.2,63.312 v1(120.2,69.824) ; DD5.12@116.912,77.565 116.987,77.49 117.765,77.49 119.896,75.359 119.896,75.104 v1(120,75)
  Bottom Layer, Bottom w0.254: v1(120,75) 120,70.172 120.2,69.972 v1(120.2,69.824)
NetDD1_8: DD1.8 DD5.13 | length 31
  Top Layer, Top w0.254: DD1.8@108.6,56.877 109.1,56.877 111.01,58.788 115.104,58.788 119,62.683 v1(119,69.727) ; DD5.13@116.912,78.835 116.98,78.767 118.733,78.767 119.043,78.457 119.043,77.854 v1(119.148,77.75)
  Bottom Layer, Bottom w0.254: v1(119,69.727) 119.074,69.801 119.074,77.676 v1(119.148,77.75)
NetDD2_6: DD2.6 VT1.1 | length 147.5
  Top Layer, Top w0.254: VT1.1@24.25,73.3 24.409,73.141 25.781,73.141 25.973,73.332 25.973,81.943 25.973,105.723 30.723,110.473 78.777,110.473 81.5,107.75 81.5,102.385 81.649,102.236 90.936,102.236 105.404,87.768 105.404,72.133 103.2,69.929 DD2.6@102.7,69.929
NetDD2_8: DD2.8 DD2.12 | length 7.8
  Top Layer, Top w0.254: DD2.8@108.6,68.659 108.656,68.715 109.781,68.715 110.698,69.632 110.698,72.14 109.1,73.739 DD2.12@108.6,73.739
NetFV1_2: FV1.2 R11.2 XP3.1 | length 29.5
  Top Layer, Top w0.5: XP3.1@54,30.54 54.346,30.194 63.206,30.194 63.7,29.7 66.1,29.7 66.594,30.194 67.606,30.194 ; R11.2@66.55,37.517 66.55,36.767 67.5,35.817 67.5,30.194 72.5,30.194 73.15,30.844 FV1.2@73.15,32.5
NetK1_1: K1.1 R3.2 | length 6.8
  Top Layer, Top w0.254: K1.1@69.108,104.467 72.519,104.467 72.986,104 R3.2@75.75,104
NetK3_1: K3.1 K4.1 R5.2 | length 14.7
  Top Layer, Top w0.5: K3.1@84.08,66 K4.1@84.08,57.75 84.93,58.6 R5.2@90.2,58.6
NetK4_7: K4.7 K5.7 R10.2 R14.2 | length 30.9
  Top Layer, Top w1.5: R10.2@65.217,45 68.805,45 69.555,45.75 69.85,45.455 R14.2@69.85,31.8 ; 68.5,45.75 68.84,46.09 K5.7@68.84,49.5 K4.7@68.84,57.75
NetK5_1: K5.1 pad.2@42.6,108.05 pad.2@48.25,108 R6.2 | length 143.4
  Top Layer, Top w0.5: R6.2@29.25,105 29.495,105 30.245,104.25 51.25,104.25 56.5,109.5 66.124,109.5 78,109.5 80.5,107 v1(80.5,98.25) ; pad.2@48.225,108.025 pad.2@48.25,108 ; v1(80.5,93) 80.5,91 77.75,88.25 77.75,47.293 78.043,47 81.58,47 K5.1@84.08,49.5
  Top Layer, Top w3: R6.2@29.25,105 32.3,108.05 pad.2@42.6,108.05 ; pad.2@42.625,108.025 pad.2@48.225,108.025
  Bottom Layer, Bottom w0.5: v1(80.5,93) v1(80.5,98.25)
NetK7_1: K7.1 pad.0@17,58.5 R8.1 R9.1 | length 116.9
  Top Layer, Top w0.5: pad.0@17,58.5 17.2,73.307 21.45,77.557 21.45,98.282 25.125,101.957 25.125,106.125 31,112 78.75,112 84.75,106 K7.1@84.75,104.58
NetR17_2: R17.2 R18.1 VD4.2 VD5.1 | length 9
  Top Layer, Top w0.254: 99.437,21.554 99.288,21.406 99.288,21.195 99.463,21.02 VD5.1@99.497,21.054 ; VD4.2@99.765,18.666 100.032,18.666 100.34,18.974 R17.2@101.865,18.974 ; VD5.1@99.765,21.054 100.032,21.054 101.492,19.595 101.492,19.347 R17.2@101.865,18.974 ; R18.1@104.75,18.75 104.526,18.974 R17.2@101.865,18.974
NetR48_2: R48.2 R49.1 VD10.2 VD11.2 VD12.2 VD13.2 | length 20.3
  Top Layer, Top w0.254: VD11.2@124.25,50.8 124.25,51.069 124.314,51.133 124.658,51.133 124.728,51.203 VD13.2@128.6,51.203 128.616,51.187 137.213,51.187 137.223,51.177 139.551,51.177 139.561,51.187 R48.2@141.508,51.187 ; R49.1@142.172,54.204 142.172,51.528 R48.2@142.204,51.496
NetVD14_1: VD14.1 VD16.1 Z1.1 | length 41.6
  Top Layer, Top w0.5: VD14.1@190.85,19.193 190.625,19.418 190.625,22.333 192.142,23.85 VD16.1@192.307,23.85 192.304,23.847 191.54,23.847 190.833,24.554 190.479,24.554 189.72,25.314 189.72,51.72 190.4,52.4 Z1.1@195.9,52.4
NetVD14_2: VD14.2 VD15.1 XP4.1 | length 17.1
  Top Layer, Top w0.5: VD14.2@191.8,17.547 193.597,15.75 194.943,15.75 194.971,15.777 195.734,15.777 196.184,16.227 196.948,16.227 197.176,16 201.855,16 202.243,16.387 205.327,16.387 XP4.1@207,18.06
NetVD15_2: VD15.2 VD17.2 Z2.1 | length 94.1
  Top Layer, Top w0.5: Z2.1@194.15,80.4 191.65,80.4 187,75.75 187,18.327 191.827,13.5 v6(200.314,13.5) ; VD15.2@197.703,17.05 197.703,20.208 198.05,20.555 VD17.2@198.05,20.797 198.05,20.749 200.5,18.299 v6(200.5,18.25)
  Bottom Layer, Bottom w0.5: v6(200.314,13.5) 200.387,13.572 200.387,14.387 200.5,14.5 v6(200.5,18.25)
NetVD16_2: VD16.2 VD17.1 XP4.2 | length 15.3
  Top Layer, Top w0.5: VD16.2@193.953,24.8 195.2,24.8 197.1,22.9 VD17.1@197.1,22.443 ; VD17.1@196.978,23.328 197.904,24.254 205.77,24.254 206.884,23.14 XP4.2@207,23.14
NetVD18_1: VD18.1 VD20.1 Z3.1 | length 34.7
  Top Layer, Top w0.5: v6(190.5,66.15) Z3.1@194.15,66.15 ; VD20.1@191.6,37.193 191.6,37.858 192.879,39.137 192.879,40.618 VD18.1@193.453,41.192 ; v6(193,46.5) 193,43.225 193.453,42.772 VD18.1@193.453,41.42
  Bottom Layer, Bottom w0.5: v6(190.5,66.15) 193.423,63.227 193.423,47.385 193.147,47.109 193.147,46.647 v6(193,46.5)
NetVD18_2: VD18.2 VD19.1 XP4.4 | length 20.1
  Top Layer, Top w0.5: VD19.1@197.6,39.443 197.45,39.443 194.953,41.94 VD18.2@194.953,41.996 195.729,42.772 v6(197.676,42.772)
  Bottom Layer, Bottom w0.5: v6(197.676,42.772) 197.676,42.698 207,33.374 XP4.4@207,33.3
NetVD19_2: VD19.2 VD21.2 XP4.3 Z1.2 Z2.2 Z3.2 | length 98.1
  Top Layer, Top w0.5: VD21.2@196.822,34.538 196.865,34.581 197.374,34.581 197.746,34.953 197.746,36.847 198.55,37.651 VD19.2@198.55,37.797 198.696,37.797 199.5,38.601 199.854,38.601 202.607,41.354 203.533,41.354 ; Z2.2@207.85,80.4 Z2.2@209.6,80.4 Z2.2@207.85,80.4
  Top Layer, Top w1: 203.533,41.354 214.53,41.354
  Top Layer, Top w1.5: XP4.3@207,28.22 213.651,28.22 214.53,29.099 214.53,41.354 214.53,52.75 ; Z1.2@209.6,52.4 209.95,52.75 213.457,52.75 214.53,52.75 ; Z3.2@209.6,66.15 213.82,66.15 ; Z2.2@209.6,80.4 213.651,80.4 213.82,80.231 213.82,66.15 ; 213.82,66.15 214.53,65.44 214.53,52.75
NetVD20_2: VD20.2 VD21.1 XP4.5 | length 17.7
  Top Layer, Top w0.5: VD20.2@192.55,35.547 192.55,35.501 194.463,33.588 VD21.1@195.177,33.588 195.304,33.715 196.068,33.715 196.295,33.488 201.715,33.488 202.376,34.149 203.102,34.149 207,38.047 XP4.5@207,38.38
OVLI: DA15.1 DA15.7 DD2.9 KT14.1 R53.2 R54.2 R55.2 | length 45.1
  Top Layer, Top w0.254: DD2.9@108.6,69.929 108.623,69.952 109.848,69.952 v1(109.871,69.974) ; KT14.1@114.5,66.75 113.1,68.15 v1(113.1,69.929) 113.248,69.929 114.419,71.1 131.601,71.1 132.212,70.49 132.185,70.463 132.185,69.682 R55.2@131.812,69.309 ; R53.2@129.75,69.309 R55.2@131.812,69.309 ; R53.2@129.831,69.09 129.75,69.17 129.75,69.009 128.412,67.67 DA15.1@128.412,63.284 129.859,63.284 130.265,63.284 130.59,62.959 130.915,62.634 131.287,62.634 131.414,62.634 DA15.7@132.812,62.634 ; R54.2@131.787,67.009 131.787,69.284 R55.2@131.812,69.309
  Bottom Layer, Bottom w0.254: v1(109.871,69.974) 109.894,69.952 113.077,69.952 v1(113.1,69.929)
OVLI,1: DD2.11 KT1.1 XP1.8 | length 69.3
  Top Layer, Top w0.254: DD2.11@108.6,72.469 108.1,72.469 106.75,73.819 106.75,90.816 111.582,95.648 v1(112.752,95.648) ; KT1.1@112.769,99.75 v1(112.769,97.641) 116.041,97.641 126.885,108.485 143.515,108.485 XP1.8@145.3,106.7
  Bottom Layer, Bottom w0.254: v1(112.752,95.648) 112.752,95.752 112.769,95.769 v1(112.769,97.641)
RUN_ADI: DD6.9 DD6.10 XP1.14 | length 109.2
  Top Layer, Top w0.254: XP1.14@151.3,106.7 152.277,107.677 162.523,107.677 v1(163.3,106.9) ; DD6.9@151.835,66.262 DD6.10@151.835,64.992 153.016,64.992 155.1,62.908 155.1,59 156.872,57.228 179.611,57.228 181.75,59.367 181.75,91.321 179.593,93.479 179.593,94.407 v1(165.25,108.75)
  Bottom Layer, Bottom w0.254: v1(163.3,106.9) 163.35,106.9 165.2,108.75 v1(165.25,108.75)
U0: DA6.7 DA6.10 DA13.3 | length 28.1
  Top Layer, Top w0.254: DA6.7@133.109,85.029 DA6.10@133.109,79.605 133.109,77.305 132.133,76.329 132.133,75.335 132.133,74.649 132.133,73.876 137,69.009 137,64.359 138.582,62.777 139.871,62.777 140.577,63.483 DA13.3@140.577,63.921
Uc: R19.2 VD6.2 VD11.1 XP3.4 | length 86.2
  Top Layer, Top w0.254: XP3.4@54,22.92 74.52,22.92 76.431,24.831 89.99,24.831 R19.2@90.121,24.7 102.468,24.7 126.071,48.302 ; VD11.1@124.25,48.8 126.351,48.8 126.351,48.795 126.5,48.646 VD6.2@126.5,48.302 ; 126.071,48.302 VD6.2@126.5,48.302 ; 126.071,48.302 VD6.2@126.5,48.302
unOVLI,1: DD2.13 DD5.5 | length 3.9
  Top Layer, Top w0.254: DD2.13@108.6,75.009 108.616,75.025 109.116,75.025 110.044,75.952 110.044,76.558 DD5.5@111.05,77.565
VLim: DA6.6 R39.1 | length 3.5
  Top Layer, Top w0.254: R39.1@133.49,87.696 134.23,87.696 134.379,87.548 DA6.6@134.379,85.029
Von: C17.2 DA11.3 KT9.1 R32.2 | length 11.2
  Top Layer, Top w0.254: DA11.3@162.82,74.902 162.82,76.862 164.32,78.362 C17.2@164.32,78.662 164.32,78.962 164.72,79.362 R32.2@166.72,79.362 167.02,79.362 167.791,78.591 KT9.1@167.791,76
Vop: C17.1 DA11.4 R33.2 | length 8.1
  Top Layer, Top w0.254: R33.2@159.52,80.962 159.52,80.662 159.947,80.235 161.347,80.235 161.347,79.589 161.32,79.562 C17.1@161.32,78.662 161.32,78.362 162.32,77.362 DA11.4@162.32,74.902
VREF_COMP: DA14.1 KT11.1 R46.2 R51.1 R52.2 | length 14.2
  Top Layer, Top w0.254: KT11.1@121.904,58.259 R46.2@125.5,58.259 ; R51.1@125.5,60 R46.2@125.5,58.259 ; R52.2@128.412,59.435 128.537,59.31 128.6,59.31 128.704,59.206 128.704,58.259 ; DA14.1@130.212,54.859 130.039,55.032 129.6,55.032 128.704,55.928 128.704,58.259 ; R46.2@125.5,58.259 128.704,58.259
X1: DA10.16 DD3.4 | length 26.9
  Top Layer, Top w0.254: DD3.4@116.912,89.039 117.349,89.039 117.942,89.631 137.05,89.631 137.523,90.104 138.068,90.104 138.333,89.839 139.025,89.839 v1(139.114,89.75) ; DA10.16@139.004,93.768 139.059,93.713 139.059,91.805 v1(139.114,91.75)
  Bottom Layer, Bottom w0.254: v1(139.114,89.75) v1(139.114,91.75)
X2: DA10.1 DD3.5 | length 29.1
  Top Layer, Top w0.254: DD3.5@116.912,90.309 129.559,90.309 v1(130.5,91.25) ; DA10.1@139.004,99.192 139.146,99.05 v1(140.4,99.05)
  Bottom Layer, Bottom w0.254: v1(130.5,91.25) 130.5,92.25 137.3,99.05 v1(140.4,99.05)
X4: DA10.9 DD3.6 | length 14.9
  Top Layer, Top w0.254: DD3.6@116.912,91.578 129.299,91.578 130.114,92.394 DA10.9@130.114,93.768
X8: DA10.8 DD3.7 | length 17.3
  Top Layer, Top w0.254: DD3.7@116.912,92.849 118.774,92.849 120.865,94.939 120.865,97.398 122.348,98.881 129.932,98.881 130.114,99.064 DA10.8@130.114,99.192
X10: DA6.1 DA6.16 DD5.7 | length 50.5
  Top Layer, Top w0.254: DD5.7@111.488,75.025 112.512,75.025 115.57,71.968 124.3,71.968 127.532,75.2 v1(129.7,75.2) ; v1(132.96,74.992) 143.235,74.992 145.819,77.576 145.819,78.366 145.9,78.447 145.9,79.104 145.399,79.605 DA6.16@140.729,79.605 DA6.1@140.729,85.029
  Bottom Layer, Bottom w0.254: v1(129.7,75.2) 129.804,75.096 132.856,75.096 v1(132.96,74.992)
нА: DA6.8 DA6.9 DD1.11 | length 43.8
  Top Layer, Top w0.254: DD1.11@108.6,60.687 110.672,60.687 110.821,60.836 110.821,68.884 113.441,71.504 114.404,71.504 127.328,71.504 130.8,74.976 130.8,79.456 130.949,79.605 DA6.9@131.839,79.605 DA6.8@131.839,85.029
pads on no net: DA3. DA4.1 DA4.3 DA4.5 DA4.7 DA4.8 DA5.1 DA5.5 DA5.8 DA7.7 DA8.1 DA8.5 DA8.8 DA9.1 DA9.5 DA9.8 DA12. DA14. DA16.2 DA16.4 DA16.6 DA16.8 DA16.9 DA16.10 DA16.12 DA17.2 DA17.4 DA17.5 DA17.8 DA17.9 DA17.12 DA18.2 DA18.4 DA18.8 DA18.10 DA18.12 DD1. DD2. DD3.9 DD3.10 DD3.11 DD3.12 DD3.13 DD3.14 DD4.7 DD4.9 DD5.9 DD6. DD6.11 DD6.12 DD6.13 K8.17 K8.18 K8.19 K8.20 XP1.16 XT1.0 XT2.0 XT3.0
copper on no net: | length 13.2
  Bottom Layer, Bottom w0.5: 68.25,18.043 68.543,17.75 70.957,17.75 71.25,18.043 71.25,20.457 70.957,20.75 68.543,20.75 68.25,20.457 68.25,18.043
  Bottom Layer, Bottom w1.5: 10.606,92.5 12.5,92.5

## Polygon pours and split planes (outlines as drawn)
GRD on Bottom Layer, Bottom "GRD" (solid, pour order 2): 0,16.75 0.25,17 31.75,17 31.75,13.5 31.5,13.25 31.5,0.083 31.583,0 51.111,0 51,0.111 51,24.482 50.982,24.5 55.123,24.5 55.873,25.25 77.25,25.25 77.25,43.707 77.271,43.729 72.25,48.75 72.25,90.75 69.921,93.079 67.5,93.079 67.5,100 67.75,100.25 75,100.25 75.871,101.121 79,101.121 79.5,101.621 79.5,106 77,108.5 64.5,108.5 55.5,99.5 31.859,99.5 31.859,64.609 30.75,63.5 20.25,63.5 20.25,75 0.024,75 0,74.976
GNDV on Bottom Layer, Bottom "GNDV" (solid, pour order 4): 163.78,97.22 190.25,70.75 179.5,70.75 178.5,71.75 177.25,73.5 175.532,75.75 163.729,87.553
GNDV on Bottom Layer, Bottom "ADC_POLY" (solid, pour order 3): 161.75,82 157.75,82 157.75,64 159.75,62 172,62 172,68 161.75,68 161.75,80.522

## Keep-outs
Keep-Out Layer, Board:
  lines w0.127: 0,0 220,0 220,115 162.5,115 162.5,110 132.5,110 132.5,115 0,115 0,0
  lines w0.5: 0,0 220,0 220,115 162.5,115 162.5,110 132.5,110 132.5,115 0,115 0,0

## Other copper
Top Layer, Top:
  rectangle net C: 14.829,43.339 18.75,48.539
  rectangle net GNDV: 205.5,68.45 211.5,77.35
  rectangle net GNDV: 205.5,67.95 211.5,77.35
  rectangle net GNDV: 205.5,54.2 211.5,63.1
  rectangle net GNDV: 205.5,43.5 211.5,49.35
  rectangle net GNDV: 163.175,33.917 164.825,37
  rectangle net GNDV: 161.1,28.7 166.9,32.125
  rectangle net GNDV: 162.918,10.117 164.568,13.2
  region net GNDV: 165.818,7.675 165.06,7.675 165.06,7.325 165.818,7.325
  region net GNDV: 143.318,31.475 142.56,31.475 142.56,31.125 143.318,31.125
  rectangle net GNDV: 161.668,7.325 162.425,7.675
  rectangle net GNDV: 89.5,77.75 93.5,79.25
  rectangle net GNDV: 140.418,34.017 142.068,37.1
  region net GNDV: 142.068,30.56 142.068,31.317 141.718,31.317 141.718,30.56
  rectangle net GNDV: 139.185,31.125 139.943,31.475
  region net GNDV: 140.118,30.542 140.118,31.3 139.768,31.3 139.768,30.542
  rectangle net GNDV: 141.217,7.325 141.975,7.675
  rectangle net GNDV: 139.075,10.117 140.725,13.2
  region net GNDV: 138.775,6.725 138.775,7.483 138.425,7.483 138.425,6.725
  rectangle net NetC16_1: 163.67,73.822 166.135,77.122
  rectangle net NetK7_1: 15.079,54 19,59.2
  region net NetK7_1: 27.464,59.103 22.875,63.692 11.125,63.692 6.536,59.103
  region net C: 27.464,43.339 22.875,38.75 11.125,38.75 6.536,43.339
  region net +8V: 155.457,9.925 155.457,15.4 141.025,15.4 141.025,10.717 141.017,10.709 141.026,10.7 141.8,10.7 141.8,10.065 141.94,9.925
  region net +8V: 142.8,9.925 142.8,13.2 141.025,13.2 141.025,10.717 141.017,10.709 141.026,10.7 141.8,10.7 141.8,10.065 141.94,9.925
  region net NetC28_1: 182.843,9.925 182.843,15.195 164.868,15.195 164.868,10.717 164.86,10.709 164.869,10.7 165.643,10.7 165.643,10.065 165.783,9.925
  region net NetC34_2: 156.5,9.925 156.5,15.4 162.618,15.4 162.618,10.717 162.626,10.709 162.617,10.7 161.843,10.7 161.843,10.065 161.703,9.925
  region net NetC38_2: 134,9.925 134,15.4 138.775,15.4 138.775,10.717 138.783,10.709 138.774,10.7 138,10.7 138,10.065 137.86,9.925
  region net NetC37_2: 173.1,33.725 173.1,37.1 165.125,37.1 165.125,34.517 165.117,34.509 165.126,34.5 165.9,34.5 165.9,33.865 166.04,33.725
  region net NetC30_1: 147.843,33.725 147.843,37.1 142.368,37.1 142.368,34.517 142.36,34.509 142.369,34.5 143.143,34.5 143.143,33.865 143.283,33.725
  region net NetC42_2: 154.9,33.075 154.9,37.1 162.875,37.1 162.875,34.517 162.883,34.509 162.874,34.5 162.1,34.5 162.1,33.196 161.979,33.075
  region net NetC39_2: 134.643,33.725 134.643,37.1 140.118,37.1 140.118,34.517 140.126,34.509 140.117,34.5 139.343,34.5 139.343,33.865 139.203,33.725
Bottom Layer, Bottom:
  rectangle net GNDV: 199,42.5 212.5,78.25
  rectangle net GNDV: 178.5,67.585 200.655,72.5
  rectangle net GNDV: 160.25,81 165,83.25
  rectangle net GNDV: 158.25,3.5 171.5,36.75
  rectangle net GNDV: 89.75,77.75 93.25,88.5
  rectangle net GNDV: 135.5,27.5 159.5,37
  rectangle net GNDV: 133.75,3.5 160.25,12
  rectangle net NetC16_1: 163.17,73.822 165.92,80.522
  text "+8" at 155.75,90.75 h2
Multi-Layer:
  rectangle net GRD: 0.5,11.5 9.5,20.5
  rectangle net -8V: 156.55,40.5 163.676,42.5
  rectangle net -8V: 157.25,38.2 162,42.5
  region net +12V: 132.8,32.2 132.8,40.4 129.9,40.4 129.9,32.2
  rectangle net GRD: 5,20.5 39.25,36.629
  rectangle net GRD: 0.5,66 9.5,75
  rectangle net GRD: 90.5,105 99.5,115
  rectangle net GRD: 90.5,0 99.5,10
  rectangle net GRD: 40.5,0 49.5,9.25
  rectangle net +8V: 143.3,13.5 151.5,16.4
  rectangle net +5.2V: 128.5,10.25 133.057,18.25

## Silkscreen, mask and mechanical layers (free items; w line width, h text height)
Top Overlay, Top Silk:
  drawing of 104 lines, arcs and shapes, not listed
  text "687243.352" at 179,108.75 h2
  text "758725.634" at 179,106.5 h2
  text "->" at 44.932,105.576 h2.5 r120
  text "->" at 47.323,104.96 h2.5 r75
  text "1" at 133.2,103.006 h2
  text "RELAYS" at 97.4,100.311 h4
  text "УПР" at 37,100 h2
  text "AMPLIFIER" at 129.6,79.8 h2 r90
  text "GRD" at 12.75,68 h2
  text "->" at 18.097,66 h2.5 r270
  text "X2" at 14.5,64.25 h2
  text "УПР" at 28.5,59.103 h2
  text "GNDV" at 217.269,55.95 h2.5 r90
  text "ADC" at 163.3,54.1 h2
  text "COMPARATOR" at 118.75,49.25 h2 r90
  text "POWER" at 169.1,47.7 h2
  text "->" at 30,46.153 h2.5 r180
  text "X3" at 28.25,43.25 h2
  text "12~" at 213.7,37.731 h2.5
  text "12~" at 213.7,32.7 h2.5
  text "-8V" at 162,27 h2.5
  text "+12V" at 138.543,26.8 h2.5
  text "GND" at 215.75,26.5 h2.5 r90
  text "8~" at 214,22.7 h2.5
  text "8~" at 213.9,17.411 h2.5
  text "+5.2V" at 137.389,3.3 h2.5
  text "+8V" at 161.843,3.2 h2.5
Bottom Overlay, Bot Silk:
  text "16" at 156.5,106.24 h2
  text "1" at 137.75,104.05 h2
  text "+8" at 144,95.25 h2
  text "+5.2" at 151,82.452 h2
  text "+5.2" at 84.75,78.25 h2
  text "+5.2" at 138.5,72.75 h2 r90
  text "+12" at 129,64.75 h2 r270
  text "+8" at 155.25,59.5 h2
  text "+4.096" at 173.491,57.632 h2 r270
  text "+4.096" at 146.25,56.25 h2
  text "-8" at 152.75,53.75 h2
  text "-8" at 160.75,43.25 h2
  text "-12" at 135.5,38.9 h2
  text "5" at 210,37.75 h2
  text "GNDV" at 99.75,32 h2
  text "1" at 50.5,30 h2
  text "+8" at 134.75,25.5 h2
  text "-8" at 113,22.5 h2
  text "4" at 50.75,22.095 h2
  text "+8" at 147.75,17.5 h2
  text "+8" at 113,17.25 h2
  text "1" at 209.75,17.25 h2
  text "+5.2" at 127.5,13.5 h2
Bottom Solder, Bot Mask:
  circle w0.2: c30,57.792 r1.5
  circle w0.5: c17,58.5 r2.5
  circle w0.5: c17,44 r2.5
  circle w0.3: c67.65,41 r1.7
  circle w0.3: c68.84,49.5 r1.7
  circle w0.3: c68.84,57.75 r1.7
  circle w0.3: c68.84,66 r1.7
  circle w0.3: c68.84,74.25 r1.7
  circle w0.3: c68.84,82.438 r1.7
  circle w0.3: c69.1,89.25 r1.7
  circle w0.3: c69.108,104.467 r1.7
  circle w0.3: c75.75,104 r1.7
  circle w0.3: c48.101,39.25 r1.7
  circle w0.3: c41.75,39.25 r1.7
  circle w0.3: c48.074,46 r1.3
  circle w0.3: c40.611,46 r1.3
  circle w0.3: c54.5,95.3 r2.267
  circle w0.3: c35.5,95.3 r2.267
  circle w0.3: c54.5,53.3 r2.267
  circle w0.3: c35.5,53.3 r2.267
  lines w0.35: 51.75,28 56.5,28
  lines w0.4: 51.75,28 51.75,33.75 52,34 76,34 76,30.75 75.75,30.5 59,30.5 56.5,28
Mechanical 5, Help:
  lines w0.2: 0,9 9,9 9,0 ; 0.5,115 0.5,106 9.5,106 ; 2.5,5 7.5,5 ; 2.5,110 7.5,110 ; 5,2.5 5,7.5 ; 5,107.5 5,112.5 ; 9.517,106 9.517,115 ; 15.5,-0.125 15.5,8.875 24.5,8.875 24.5,-0.125 ; 17.5,5 22.5,5 ; 20,2.5 20,7.5 ; 41,0 41,9 49,9 49,0 ; 91,115 91,106 99,106 99,115 ; 92.5,4.75 97.5,4.75 ; 92.5,110 97.5,110 ; 95,2.25 95,7.25 ; 95,107.5 95,112.5 ; 99,0.75 99,9.75 ; 106,0 106,9 114,9 114,0 ; 106,115 106,106 114,106 114,115 ; 107.5,5 112.5,5 ; 107.5,110 112.5,110 ; 110,2.5 110,7.5 ; 110,107.5 110,112.5 ; 116,110 120,110 ; 118,108 118,112 ; 123,110 127,110 ; 125,108 125,112 ; 195.5,0 195.5,9 204.5,9 204.5,0 ; 195.5,115 195.5,106 204.5,106 204.5,115 ; 197.5,5 202.5,5 ; 197.5,110 202.5,110 ; 200,2.5 200,7.5 ; 200,107.5 200,112.5 ; 210.5,0 210.5,9 219.5,9 219.5,0 ; 210.5,115 210.5,106 219.5,106 219.5,115 ; 212.5,5 217.5,5 ; 212.5,110 217.5,110 ; 215,2.5 215,7.5 ; 215,107.5 215,112.5 ; 42.5,5 47.5,5 42.5,5 ; 45,2.5 45,7.5 45,2.5

## Text inside footprints (layer, text, board x,y; h text height)
C7: Top Overlay, Top Silk "+" at 162.741,65.022 h2 r90
C28: Top Overlay, Top Silk "+" at 182.893,15.3 h2 r270
C30: Top Overlay, Top Silk "+" at 182.893,36.6 h2 r270
C37: Top Overlay, Top Silk "+" at 182.9,26.8 h2 r270
XP4: Top Overlay, Top Silk "1" at 205,18.063 h4 r90